# Altium PCB TX.PcbDoc
Units mil, origin at the board's own origin, x right, y up, seen from the top; angles counter-clockwise.
Board outline 2000 x 2375 mil, 2 copper layers (Top Layer, Bottom Layer); 25 components, 0 nets, 103 pads, 4 vias.
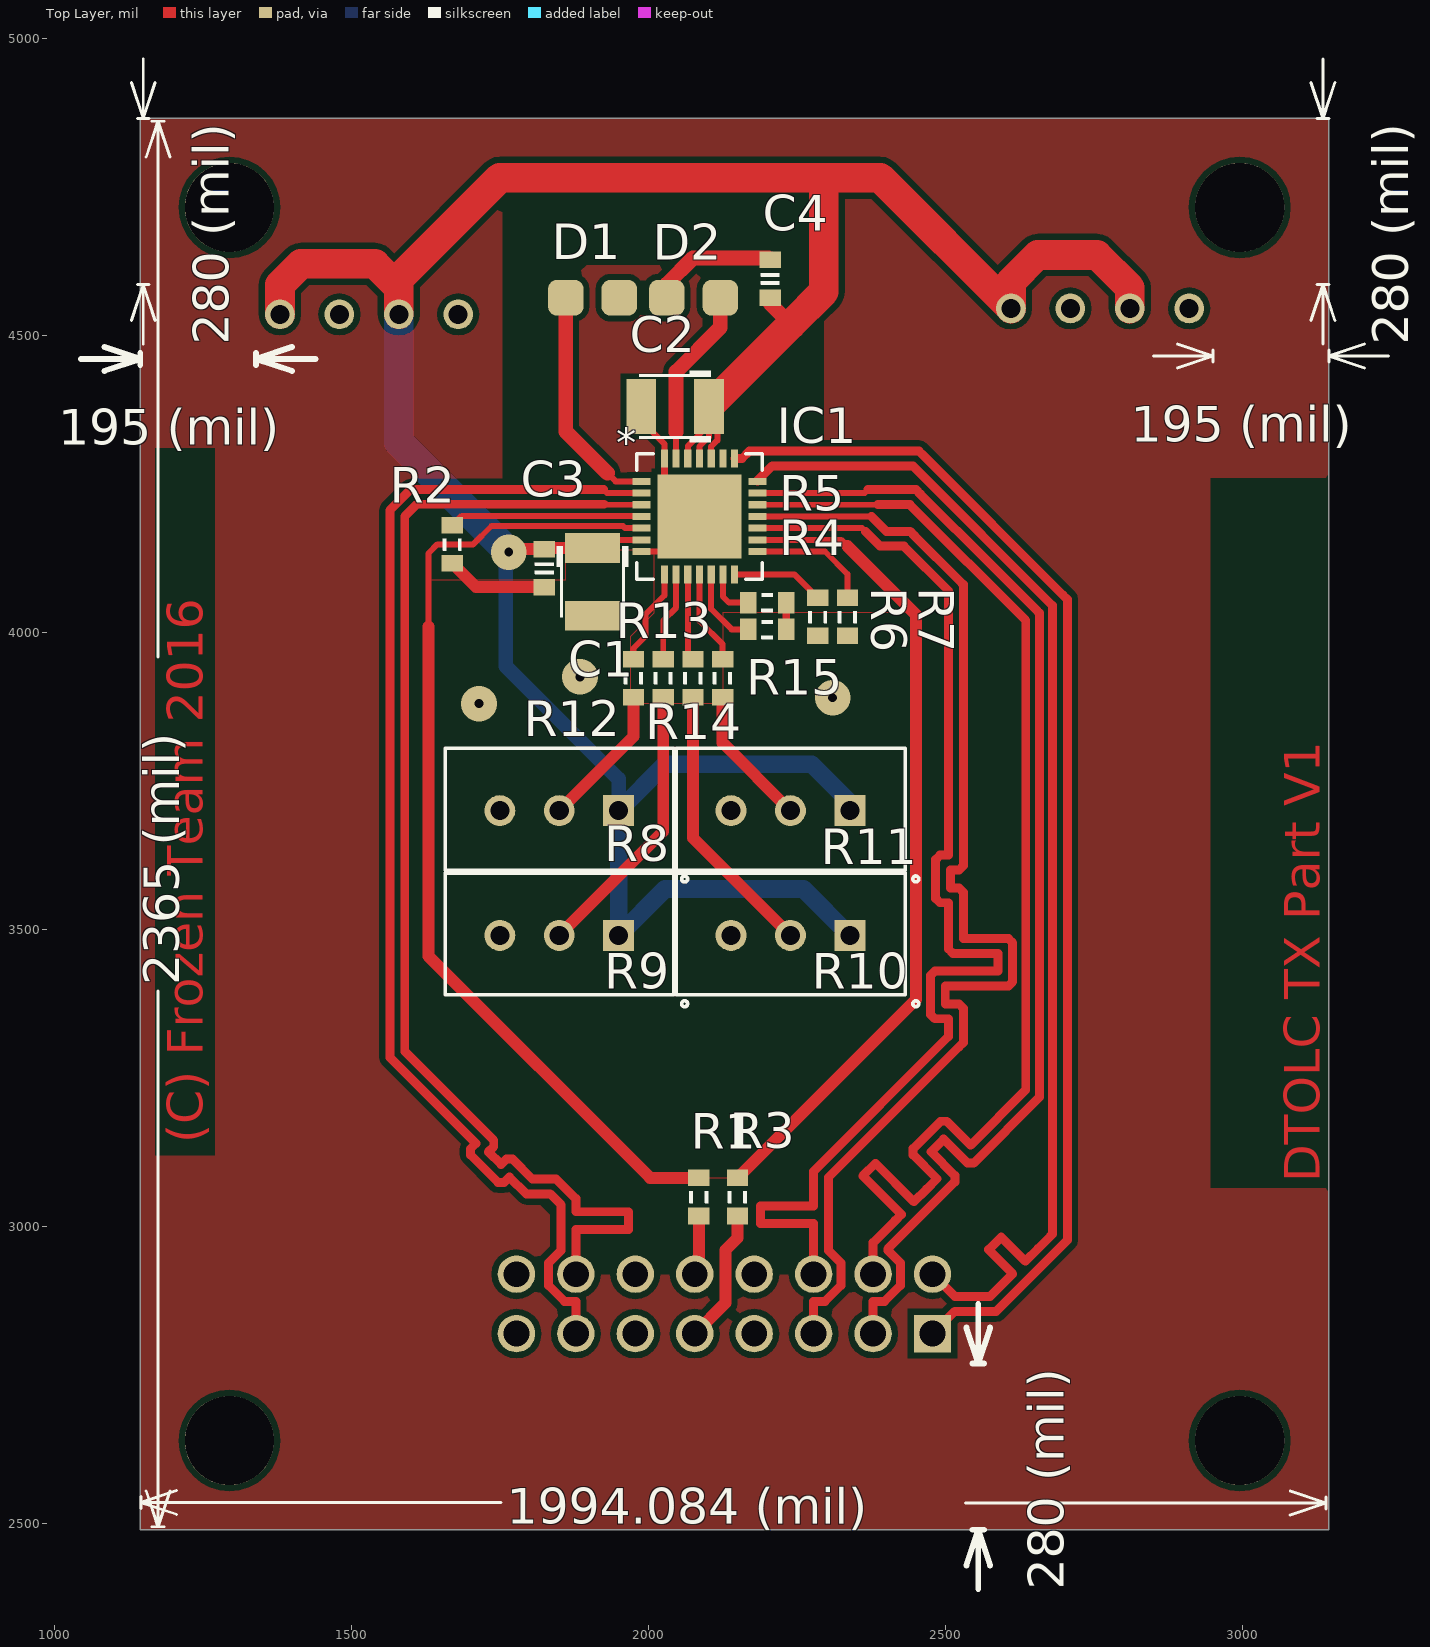
[diagram p0: Top Layer view]
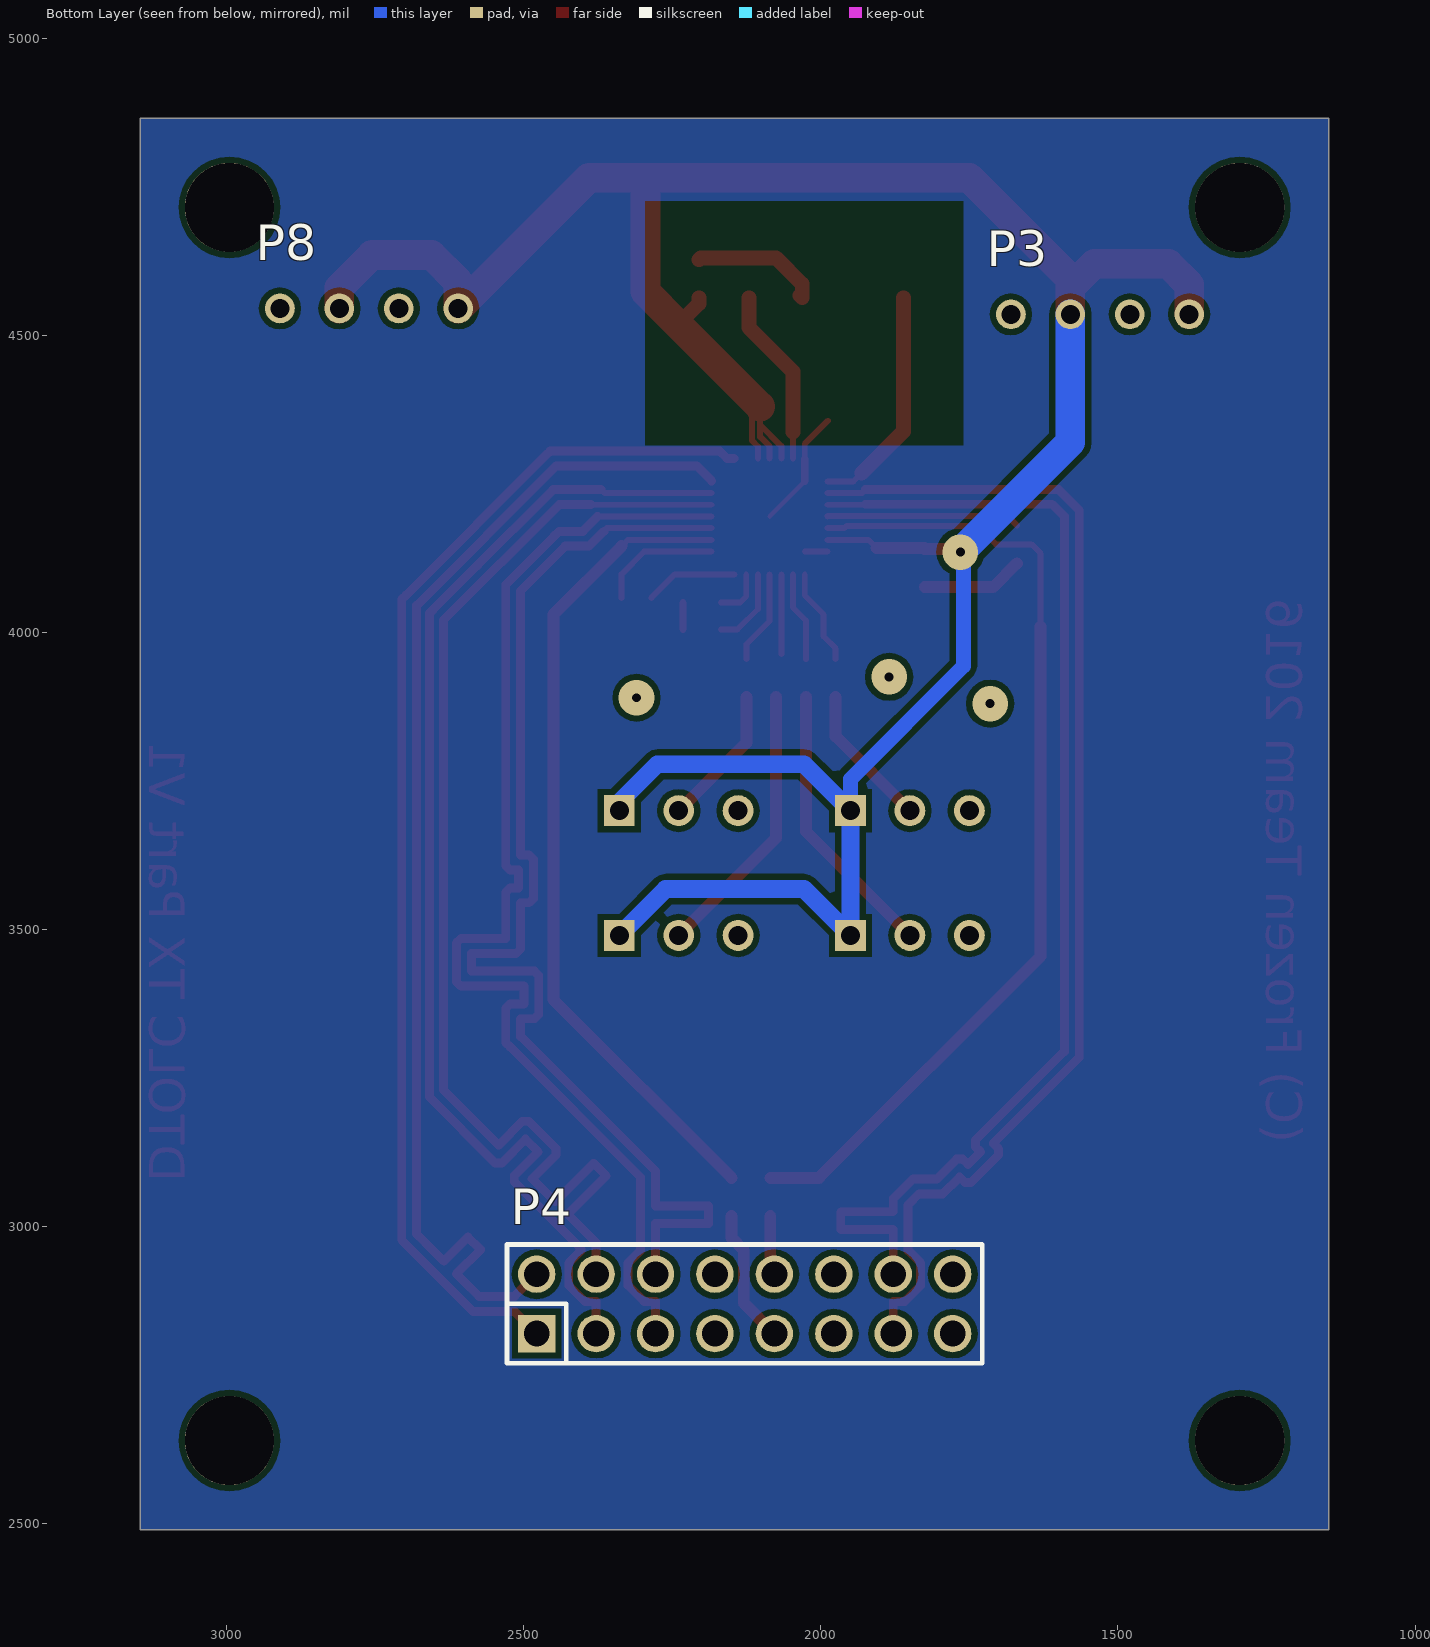
[diagram p1: Bottom Layer view, seen from below]

## Layer stack, top to bottom
Top Solder: solder mask 0.4, Solder Resist, Dk 3.5
Top Layer: signal copper 1.4
Dielectric 1: dielectric 12.6, FR-4, Dk 4.8
Bottom Layer: signal copper 1.4
Bottom Solder: solder mask 0.4, Solder Resist, Dk 3.5

## Board outline
1145,4865 3145,4865 3145,2490 1145,2490

## Design rules (kind name [scope] priority, off if disabled: settings)
Clearance [All] p1: gap=10
PolygonConnect [All] p1: connectstyle=Relief reliefconductorwidth=10 reliefentries=4 polygonreliefangle="90 Angle" airgapwidth=10
RoomDefinition TransmitterV1 [InComponentClass('TransmitterV1')] p1: confinementstyle=ConfineIn formatcopy=TRUE lockcomponents=FALSE outline 1145,2490 3145,2490 3145,4865 1145,4865
RoutingVias [All] p1: holewidth=28 width=50 viastyle="Through Hole" minholewidth=28 minwidth=50 maxholewidth=28 maxwidth=50
SolderMaskExpansion [All] p1: expansion=4
Width [All] p1: maxlimit=10 minlimit=10 preferedwidth=10
30 further rules are at their usual default settings.

## Components (designator, comment, footprint, x,y, rotation, side; value= is the part's Value field where it differs from the comment)
C1 "Cap_Tan_1210" CAP_TAN_B1210 1906,4085 r270 top
C2 "Cap_Tan_1210" CAP_TAN_B1210 2045,4380 r180 top
C3 "Cap_0603" CAP_0603 1825,4108 r90 top
C4 "Cap_0603" CAP_0603 2205,4595 r270 top
D1 "Laser Diode" LaserDiode 1861,4563 r0 top
D2 "Laser Diode" LaserDiode 2121,4563 r180 top
IC1 "LMH6525SPNOPB" SPA28A 2086,4195 r0 top
P3 "HDR1x4_2.54" HDR1x4_2.54_180 1380,4535 r270 bottom
P4 "WE-2.54 mm Pin Header" 61301621121 2128,2870 r180 bottom
P8 "HDR1x4_2.54" HDR1x4_2.54_180 2610,4545 r270 bottom
R1 "Res_0603" RES_0603 2085,3050 r90 top
R2 "Res_0603" RES_0603 1670,4148 r90 top
R3 "Res_0603" RES_0603 2150,3050 r270 top
R4 "Res_0603" RES_0603 2200,4005 r180 top
R5 "Res_0603" RES_0603 2200,4050 r180 top
R6 "Res_0603" RES_0603 2285,4026 r90 top
R7 "Res_0603" RES_0603 2335,4026 r90 top
R8 "3296W-1-512LF" POT_3296W 1751,3705 r180 top
R9 "3296W-1-512LF" POT_3296W 1751,3495 r180 top
R10 "3296W-1-512LF" POT_3296W 2140,3495 r180 top
R11 "3296W-1-512LF" POT_3296W 2140,3705 r180 top
R12 "Res_0603" RES_0603 1975,3923 r90 top
R13 "Res_0603" RES_0603 2025,3923 r90 top
R14 "Res_0603" RES_0603 2075,3923 r90 top
R15 "Res_0603" RES_0603 2125,3923 r90 top

## Footprints (in the part's own frame and the unit in brackets; to place one, negate y for a bottom-side part, rotate by r counter-clockwise, add the part's x,y. Pads: shape width x height; smd on the part's side, far side on the other; paste and mask are expansions set on the pad)
61301621121 [mm] "16 pins, dual pin, straight, gold plating"
  rect 1.6x1.6 hole 1.1: 1(-8.89,-1.27)
  round 1.6 hole 1.1: 2(-6.35,-1.27) 3(-3.81,-1.27) 4(-1.27,-1.27) 5(1.27,-1.27) 6(3.81,-1.27) 7(6.35,-1.27) 8(8.89,-1.27) 9(8.89,1.27) 10(6.35,1.27) 11(3.81,1.27) 12(1.27,1.27) 13(-1.27,1.27) 14(-3.81,1.27) 15(-6.35,1.27) 16(-8.89,1.27)
  silkscreen extent -10.16,-2.54 10.16,2.54, body extent -10.16,-2.54 10.16,2.54, height 8.55
CAP_0603 [mil]
  rect 28x36 smd: 1(-32,0) 2(32,0)
  silkscreen extent -10,-16 10,16, body extent -31,-16 32,16, height 36
CAP_TAN_B1210 [mil]
  rect 50x92 smd: 1(-57,0) 2(57,0)
  silkscreen extent -60,-60 60,60, body extent -69,-55 69,55, height 83
HDR1x4_2.54_180 [mil]
  round 50 hole 32: 1(0,0) 2(0,-100) 3(0,-200) 4(0,-300)
  body extent -49,-350 49,50, height 323
LaserDiode [mil]
  rrect50% 60x60 smd: A(0,0) K(90,0)
POT_3296W [mil]
  round 52 / inner round 60 / far side round 52 hole 32: 1(1,5) 2(-99,5)
  rect 52x52 / inner round 60 / far side rect 52x52 hole 32: 3(-199,5)
  silkscreen extent -315,-100 93,125, body extent -286,-92 89,103, height 455
RES_0603 [mil]
  rect 28x36 smd: 1(-32,0) 2(32,0)
  silkscreen extent -10,-16 10,16, body extent -31,-16 32,16, height 20
SPA28A [mil]
  rect 30x12 smd: 1(-97.5,59.06) 2(-97.5,39.37) 3(-97.5,19.69) 4(-97.5,0) 5(-97.5,-19.69) 6(-97.5,-39.37) 7(-97.5,-59.06) 15(97.5,-59.06) 16(97.5,-39.37) 17(97.5,-19.69) 18(97.5,0) 19(97.5,19.69) 20(97.5,39.37) 21(97.5,59.06)
  rect 12x30 smd: 8(-59.06,-97.5) 9(-39.37,-97.5) 10(-19.68,-97.5) 11(0,-97.5) 12(19.68,-97.5) 13(39.37,-97.5) 14(59.06,-97.5) 22(59.06,97.5) 23(39.37,97.5) 24(19.68,97.5) 25(0,97.5) 26(-19.68,97.5) 27(-39.37,97.5) 28(-59.06,97.5)
  rect 141.73x141.73 smd paste-70.37: 29(0,0)
  silkscreen extent -106,-106 106,106, body extent -102,-102 103,103, height 20

## Part data
C1 C2 C3 C4: "Capacitor"
IC1: "Imported"
P3 P8: library part HDR1x4_2.54T, "Header"
P4: library part "WE-2.54 mm Pin Header & Jumper 61301621121", "WR-PHD 2.54 mm Dual Pin Header"
R1 R2 R3 R4 R5 R6 R7 R12 R13 R14 R15: "Resistor"
R8 R9 R10 R11: library part 3296W-1-503LF, "Imported"

## Free pads (board coordinates)
  round 150 / inner round 60 / far side round 150 hole 150: 3(1295,2640) 3(1295,4715) 3(2995,2640) 3(2995,4715)

## Via types
v1: diameter 60, hole 15, Top Layer to Bottom Layer, 4 vias

## Nets (pads, with @x,y where several pads share a name; then routed paths per layer and width w, separated by ;. In a path a pad name is that pad's centre, name@x,y a point inside that pad or via, vN(x,y) a via of type N, cw(c..) or ccw(c..) an arc to the next point about the centre after c; other vN are vias at no path point)
pads on no net: C1.1 C1.2 C2.1 C2.2 C3.1 C3.2 C4.1 C4.2 D1.A D1.K D2.A D2.K IC1.1 IC1.2 IC1.3 IC1.4 IC1.5 IC1.6 IC1.7 IC1.8 IC1.9 IC1.10 IC1.11 IC1.12 IC1.13 IC1.14 IC1.15 IC1.16 IC1.17 IC1.18 IC1.19 IC1.20 IC1.21 IC1.22 IC1.23 IC1.24 IC1.25 IC1.26 IC1.27 IC1.28 IC1.29 P3.1 P3.2 P3.3 P3.4 P4.1 P4.2 P4.3 P4.4 P4.5 P4.6 P4.7 P4.8 P4.9 P4.10 P4.11 P4.12 P4.13 P4.14 P4.15 P4.16 P8.1 P8.2 P8.3 P8.4 R1.1 R1.2 R2.1 R2.2 R3.1 R3.2 R4.1 R4.2 R5.1 R5.2 R6.1 R6.2 R7.1 R7.2 R8.1 R8.2 R8.3 R9.1 R9.2 R9.3 R10.1 R10.2 R10.3 R11.1 R11.2 R11.3 R12.1 R12.2 R13.1 R13.2 R14.1 R14.2 R15.1 R15.2
copper on no net: | length 28939.9
  Top Layer w8: 2026.94,4254.06 2086,4195
  Top Layer w10: 1630,4010 1630,4133 1645,4148 1705,4148 1736,4179 1956.97,4179 1960.66,4175.31 1988.5,4175.31 ; 1670,4180 1686,4196 1988.5,4196 1988.5,4195 ; 1906,4142 1919.63,4155.63 1988.5,4155.63 ; 1924.5,4240.5 1930.63,4234.37 1988.5,4234.37 ; 1930,4215 1988.5,4214.69 ; 1931,4268 1944.94,4254.06 1988.5,4254.06 ; 1975,3955 1975,3973 1995,3993 1995,4030 2026.94,4061.94 2026.94,4097.5 ; 1988,4356 2026.94,4317.06 2026.94,4292.5 ; 1988.5,4135.94 2026.94,4135.94 ; 2025,3955 2025,4020 2046.63,4041.63 2046.63,4097.5 ; 2046.63,4292.5 2046.63,4337.37 ; 2066.32,3963.68 2066.32,4097.5 ; 2066.32,4292.5 2066.32,4313.31 2102,4349 ; 2086,4097.5 2086,4019 2125,3980 2125,3955 ; 2086,4292.5 2086,4313 2102,4329 2102,4349 ; 2102,4380 2102,4349 ; 2105.68,4097.5 2105.68,4039.32 2140,4005 2168,4005 ; 2105.68,4292.5 2105.68,4312.69 2116,4323 2116,4366 ; 2125.37,4097.5 2125.37,4060.37 2135.74,4050 2168,4050 ; 2145.06,4097.5 2245.5,4097.5 2285,4058 ; 2183.5,4135.94 2297.06,4135.94 2335,4098 2335,4058 ; 2183.5,4155.63 2324.37,4155.63 2335,4145 ; 2183.5,4175.31 2359.68,4175.31 ; 2183.5,4195 2375.36,4195 ; 2183.5,4214.69 2386.15,4214.69 ; 2183.5,4234.37 2364.01,4234.37 2369.64,4240
  Top Layer w12: 2026.94,4254.06 2026.94,4292.5 ; 2102,4380 2116,4366 ; 2232,4005 2232,4050
  Top Layer w15: 1878,2820 1878,2874 1858.95,2874 1832,2900.95 1832,2939.05 1853,2960.05 1853,3036.64 1834.64,3055 1794.64,3055 1766.23,3083.41 1757.27,3074.45 1746.91,3074.45 1700.7,3120.66 1700.7,3131.01 1709.67,3139.98 1565,3284.64 1565,4205.36 1600.14,4240.5 1924.5,4240.5 ; 1878,2920 1878,2925 1878,2935 1878,2965 1878,2995 1966.37,2995 1966.37,3025 1878,3025 1878,3040 1878,3047 1845,3080 1805,3080 1771.41,3113.59 1761.06,3113.59 1752.09,3104.62 1730.88,3125.84 1739.84,3134.8 1739.84,3145.16 1590,3295 1590,4195 1610.5,4215.5 1925,4215.5 ; 2145.87,4292.5 2157.5,4292.5 2170,4305 2455.36,4305 2462.68,4297.68 2697.68,4062.68 2705,4055.36 2705,2977.14 2585.36,2857.5 2515.5,2857.5 2478,2820 ; 2183.5,4254.87 2208.63,4280 2445,4280 2680,4045 2680,3050 2680,3032.5 2680,3002.5 2680,2987.5 2676.75,2984.25 2655.53,2963.03 2634.32,2941.82 2593.67,2982.47 2572.46,2961.26 2613.11,2920.61 2602.5,2910 2575,2882.5 2515.5,2882.5 2478,2920 ; 2278,2820 2278,2874 2297.05,2874 2324,2900.95 2324,2939.05 2303,2960.05 2303,3082.64 2522.68,3302.32 2530,3309.64 2530,3367.5 2522.68,3374.82 2499.5,3374.82 2499.5,3404.82 2605.68,3404.82 2613,3412.14 2613,3477.5 2605.68,3484.82 2530,3484.82 2530,3562.68 2522.68,3570 2508.33,3570 2508.33,3600 2522.68,3600 2530,3607.32 2530,4080.36 2522.68,4087.68 2447.68,4162.68 2440.36,4170 2400.36,4170 2375.36,4195 ; 2278,2920 2278,2990 2278,3005 2188.84,3005 2188.84,3035 2278,3035 2278,3065 2278,3090 2278,3093 2505,3320 2505,3349.82 2481.82,3349.82 2474.5,3357.14 2474.5,3422.5 2481.82,3429.82 2588,3429.82 2588,3459.82 2512.32,3459.82 2505,3467.14 2505,3545 2490.65,3545 2483.33,3552.32 2483.33,3617.68 2490.65,3625 2505,3625 2505,4070 2430,4145 2390,4145 2365,4170 ; 2369.64,4240 2450.36,4240 2457.68,4232.68 2577.68,4112.68 2652.68,4037.68 2658,4032.36 2658,3217.64 2547.35,3107 2537,3107 2496.8,3147.19 2475.59,3125.98 2515.78,3085.78 2515.78,3075.43 2403,2962.64 2403,2960.05 2424,2939.05 2424,2900.95 2397.05,2874 2378,2874 2378,2820 ; 2378,2920 2378,2973 2415,3010 2425.61,3020.61 2360.91,3085.3 2382.12,3106.52 2446.82,3041.82 2468.03,3063.03 2485.61,3080.61 2445.41,3120.8 2445.41,3131.16 2491.62,3177.37 2501.98,3177.37 2542.18,3137.18 2635,3230 2635,4020 2440,4215 2386.47,4215
  Top Layer w20: 1630,4010 1630,3455 2003,3082 2085,3082 ; 1670,4116 1710,4076 1825,4076 ; v1@1772,4140 1825,4140 ; 1825,4142 1906,4142 ; 1850,3490 2025,3665 2025,3891 ; 1850,3700 1975,3825 1975,3891 ; 2075,3891 2075,3654 2239,3490 ; 2078,2820 2129.5,2871.5 2129.5,2960.58 2150,2981.08 2150,3018 ; 2078,2920 2085,2927 2085,3018 ; 2125,3891 2125,3814 2239,3700 ; 2150,3082 2450,3382 2450,4030 2335,4145
  Top Layer w25: 1861,4563 1861,4338 1931,4268 ; 2035,4567 2031,4563 2031,4586 2075,4630 2202,4630 2205,4627 ; 2046.63,4337.37 2046.63,4438.63 2121,4513 2121,4563 ; 2205,4563 2205,4553 2240,4518
  Top Layer w50: 1380,4535 1380,4585 1415,4620 1540,4620 1580,4580 ; 1580,4535 1580,4580 ; 2102,4380 2240,4518 2295,4573 2295,4765 ; 2810,4545 2810,4580 2755,4635 2655,4635 2610,4590 2610,4545 2390,4765 2295,4765 ; 1580,4580 1580,4595 1750,4765 2295,4765
  Bottom Layer w25: v1@1760,4128 1760,3943 1950,3753 1950,3700
  Bottom Layer w30: 2339,3490 2261,3568 2028,3568 1950,3490 1950,3700 2028,3778 2275,3778 2339,3714
  Bottom Layer w50: 1580,4535 1580,4320 v1(1765,4135)
  other v1: 1715,3880 2310,3890 1885,3925

## Polygon pours and split planes (outlines as drawn)
no net on Top Layer "TopGND" (solid, pour order 4): 1951,4263 1991,4263 2021,4263 2026,4263 2026,4353 2026,4448 2090.5,4512.5 2090.5,4603.5 2076,4618 2026,4618 1896,4618 1876,4598 1876,4483 1876,4408 1876,4338 1931,4283
no net on Top Layer "TopGND" (solid, remove dead copper, pour order 2): 2010,4138 1940,4138 1860,4138 1860,4088 1850,4088 1825,4088 1630,4088 1630,3805 1630,3455 2003,3082 2150,3082 2375,3307 2450,3382 2450,3708 2450,4033 2235,4033 2125,4033 2125,3880 1970,3880 1970,3993 2010,4033
no net on Top Layer "TopGND" (solid, pour order 0): 1145,4865 1755,4865 1755,4315 1755,4310 1755,4305 1755,4250 1600,4250 1600,3250 1640,3215 1835,3020 1835,2920 2200,2920 2435,2915 2650,2915 2715,2980 2710,4065 2455,4320 2370,4320 2295,4320 2295,4790 1755,4790 1755,4865 2295,4865 3145,4865 3145,2490 1145,2490
no net on Bottom Layer "BottomGND" (solid, pour order 6): 1145,4865 1760,4865 2295,4865 2295,4725 1760,4725 1760,4590 1760,4315 2295,4315 2295,4590 2295,4865 3145,4865 3145,2490 1145,2490

## Other copper
Top Layer:
  text "(C) Frozen Team 2016" at 1250,3140 h60 r90
  text "DTOLC TX Part V1" at 3130,3075 h60 r90

## Silkscreen, mask and mechanical layers (free items; w line width, h text height)
Top Overlay:
  lines w5: 1130,4525 1150,4585 ; 1130,4925 1150,4865 ; 1140,4585 1160,4585 ; 1140,4865 1160,4865 ; 1145.91,2525.99 1145.92,2545.99 ; 1150,4485 1150,4585 ; 1150,4965 1150,4865 ; 1155,2555 1175,2495 ; 1155,4800 1175,4860 ; 1165,2495 1185,2495 ; 1165,4860 1185,4860 ; 1170,4525 1150,4585 ; 1170,4925 1150,4865 ; 1175,3396.59 1175,2495 ; 1175,3958.41 1175,4860 ; 1195,2555 1175,2495 ; 1195,4800 1175,4860 ; 1205.91,2515.96 1145.92,2535.99 ; 1205.93,2555.96 1145.92,2535.99 ; 1752.08,2535.69 1145.92,2535.99 ; 2533.84,2535.3 3140,2535 ; 2850,4465 2950,4465 ; 2890,4445 2950,4465 ; 2890,4485 2950,4465 ; 2950,4455 2950,4475 ; 3079.99,2515.03 3140,2535 ; 3080.01,2555.03 3140,2535 ; 3115,4525 3135,4585 ; 3115,4925 3135,4865 ; 3125,4585 3145,4585 ; 3125,4865 3145,4865 ; 3135,4485 3135,4585 ; 3135,4965 3135,4865 ; 3139.99,2525 3140,2545 ; 3145,4455 3145,4475 ; 3155,4525 3135,4585 ; 3155,4925 3135,4865 ; 3205,4445 3145,4465 ; 3205,4485 3145,4465 ; 3245,4465 3145,4465
  lines w10: 1045,4460 1145,4460 ; 1085,4440 1145,4460 ; 1085,4480 1145,4460 ; 1145,4450 1145,4470 ; 1340,4450 1340,4470 ; 1400,4440 1340,4460 ; 1400,4480 1340,4460 ; 1440,4460 1340,4460 ; 2535,2430 2555,2490 ; 2535,2830 2555,2770 ; 2545,2490 2565,2490 ; 2545,2770 2565,2770 ; 2555,2390 2555,2490 ; 2555,2870 2555,2770 ; 2575,2430 2555,2490 ; 2575,2830 2555,2770
  text "280 (mil)" at 1293.96,4484.08 h60 r90
  text "280 (mil)" at 3278.96,4484.08 h60 r90
  text "195 (mil)" at 2811.57,4321.04 h60
  text "195 (mil)" at 1006.57,4316.04 h60
  text "2365 (mil)" at 1210.99,3406.59 h60 r90
  text "1994.084 (mil)" at 1762.06,2499.69 h60 r359.97
  text "280 (mil)" at 2698.96,2389.08 h60 r90

## Text inside footprints (layer, text, board x,y; h text height)
IC1: Top Overlay "*" at 1946,4295 h50; Mechanical 1 "*" at 1946,4295 h50